# Altium PCB PCB.PcbDoc (part 2 of 2)
Units mil, origin at the board's own origin, x right, y up, seen from the top; angles counter-clockwise.
Board outline 10740 x 3770 mil, 2 copper layers (Top Layer, Bottom Layer); 124 components, 113 nets, 453 pads, 174 vias.
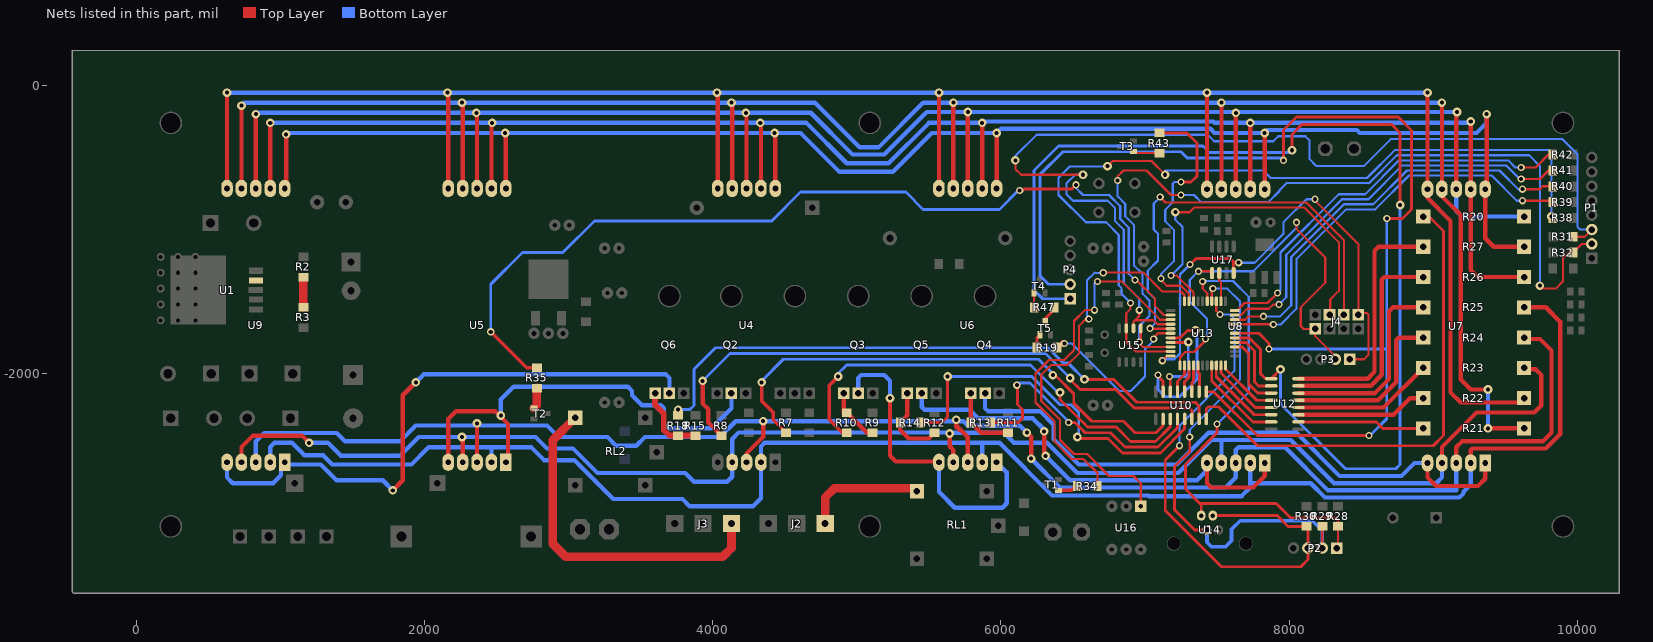
[diagram p2: the nets of this part, all layers, seen from the top]

## Via types
v1: diameter 60, hole 28, Top Layer to Bottom Layer, 82 vias
v2: diameter 50, hole 28, Top Layer to Bottom Layer, 81 vias
v3: diameter 80, hole 35, Top Layer to Bottom Layer, 7 vias
v4: diameter 60, hole 35, Top Layer to Bottom Layer, 1 vias
v5: diameter 80, hole 28, Top Layer to Bottom Layer, 1 vias
v6: diameter 100, hole 40, Top Layer to Bottom Layer, 1 vias
v7: diameter 50, hole 28, Top Layer to Bottom Layer, tented bottom, 1 vias

## Nets (pads, with @x,y where several pads share a name; then routed paths per layer and width w, separated by ;. In a path a pad name is that pad's centre, name@x,y a point inside that pad or via, vN(x,y) a via of type N, cw(c..) or ccw(c..) an arc to the next point about the centre after c; other vN are vias at no path point) (continued)
NetQ2_2: Q2.2 U5.1 U5.5 | length 3166.2
  Top Layer w30: U5.5@2165,-2615 2165,-2315 2220,-2260 2490,-2260 v1@2520,-2290 ; v1(2530,-2290) v1@2520,-2290 ; U5.1@2565,-2615 2580,-2600 2580,-2350 v1@2520,-2290
  Bottom Layer w30: v1(2530,-2290) 2530,-2180 2620,-2090 3410,-2090 3440,-2120 3440,-2150 3510,-2220 3640,-2220 3660,-2240 3660,-2350 3690,-2380 3990,-2380 4130,-2240 Q2.2@4130,-2137.5
NetQ3_1: Q3.1 R9.1 R10.2 | length 384.6
  Top Layer w30: Q3.1@4910,-2137.5 4910,-2270 R10.2@4920,-2280 ; R10.2@4930,-2270 5070,-2410 R9.1@5110,-2410
NetQ3_2: Q3.2 U6.1 U6.5 | length 2283
  Top Layer w30: v1(5230,-2170) 5230,-2570 5270,-2610 5565,-2610 U6.5@5570,-2615 ; U6.1@5970,-2615 U6.1@5975,-2615
  Bottom Layer w30: Q3.2@5010,-2137.5 5010,-2030 5030,-2010 5190,-2010 5230,-2050 v1(5230,-2170) ; U6.5@5570,-2615 5570,-2820 5680,-2930 6010,-2930 6040,-2900 6040,-2685 U6.1@5970,-2615
NetQ4_1: Q4.1 R11.1 R13.2 | length 541.5
  Top Layer w30: Q4.1@5790,-2137.5 5790,-2260 R13.2@5790,-2340 5793.64,-2340 5863.64,-2410 5940,-2410 ; 5990,-2410 5940,-2410 ; R11.1@6050,-2410 5940,-2410
NetQ4_2: Q4.2 U7.1 U7.5 | length 4336.1
  Top Layer w30: U7.5@8960,-2620 8960,-2720 9020,-2780 9310,-2780 9360,-2730 U7.1@9360,-2620
  Bottom Layer w30: Q4.2@5915,-2112.5 Q4.2@5890,-2137.5 5890,-2240 5910,-2260 6270.5,-2260 6365,-2354.5 6365,-2454.29 6540.71,-2630 7220,-2630 7440,-2410 8050,-2410 8350,-2710 8780,-2710 8870,-2620 U7.5@8960,-2620
NetQ5_1: Q5.1 R12.2 R14.1 | length 554.6
  Top Layer w30: Q5.1@5350,-2137.5 5350,-2290 R14.1@5300,-2340 5300,-2390 5360,-2450 5500,-2450 R12.2@5540,-2410
NetQ5_2: Q5.2 U8.1 U8.5 | length 3137.9
  Top Layer w30: v1(6300,-2400) 6300,-2560 v1(6310,-2570) ; U8.5@7430,-2620 7430,-2760 7460,-2790 7750,-2790 7830,-2710 U8.1@7830,-2620
  Bottom Layer w30: Q5.2@5450,-2137.5 5450,-2230 5470,-2250 5780,-2250 5840,-2310 6220,-2310 6300,-2390 v1(6300,-2400) ; v1(6310,-2570) 6480,-2740 7360,-2740 7430,-2670 U8.5@7430,-2620
NetQ6_1: Q6.1 R15.1 R18.2 | length 513.9
  Top Layer w40: Q6.1@3600,-2137.5 3600,-2215.93 3660,-2275.93 3660,-2390 3700,-2430 R18.2@3760,-2430 R15.1@3880,-2430
NetQ6_2: Q6.2 U9.1 U9.5 | length 4167.4
  Top Layer w30: v1(1780,-2810) 1850,-2740 1850,-2150 v1(1940,-2060)
  Bottom Layer w30: U9.5@630,-2615 630,-2720 670,-2760 950,-2760 1005,-2705 1005,-2640 U9.1@1030,-2615 1045,-2630 1280,-2630 1390,-2740 1710,-2740 v1(1780,-2810) ; v1(1940,-2060) 1995,-2005 3675,-2005 3700,-2030 Q6.2@3700,-2137.5
NetR2_1: R2.1 R3.2 U1.4 | length 210
  Top Layer w60: R3.2@1160,-1540 R2.1@1160,-1330
NetR19_1: R19.1 T5.1 | length 98.3
  Top Layer w20: R19.1@6250,-1820 6250,-1750 T5.1@6270,-1730
NetR20_1: R20.1 U10.16 | length 3463
  Top Layer w20: U10.16@7425,-2314.49 7425,-2245 7440,-2230 7510,-2230 7780,-2500 9000,-2500 9070,-2430 9070,-1010 8970,-910 R20.1@8930,-910
NetR21_1: R21.1 U12.10 | length 884.2
  Top Layer w20: U12.10@8064.49,-2335 8605,-2335 8650,-2380 R21.1@8930,-2380
NetR22_1: R22.1 U12.11 | length 913.1
  Top Layer w30: U12.11@8064.49,-2285 8725,-2285 8840,-2170 R22.1@8930,-2170
NetR23_1: R23.1 U12.12 | length 979.4
  Top Layer w30: U12.12@8064.49,-2235 8655,-2235 R23.1@8930,-1960
NetR24_1: R24.1 U12.13 | length 1216
  Top Layer w30: U12.13@8064.49,-2185 8615.71,-2185 8742.5,-2058.21 8742.5,-1767.5 8760,-1750 R24.1@8930,-1750
NetR25_1: R25.1 U12.14 | length 1387.3
  Top Layer w30: U12.14@8064.49,-2135 8595,-2135 8692.5,-2037.5 8692.5,-1567.5 8720,-1540 R25.1@8930,-1540
NetR26_1: R26.1 U12.15 | length 1565.3
  Top Layer w30: U12.15@8064.49,-2085 8565.71,-2085 8642.5,-2008.21 8642.5,-1347.5 8660,-1330 R26.1@8930,-1330
NetR27_1: R27.1 U12.16 | length 1736.6
  Top Layer w30: U12.16@8064.49,-2035 8545,-2035 8592.5,-1987.5 8592.5,-1147.5 8620,-1120 R27.1@8930,-1120
NetR34_2: R34.2 T1.1 | length 142.4
  Top Layer w25: T1.1@6400,-2810 6490,-2810 6520,-2780 R34.2@6530,-2780
NetR35_2: R35.2 T2.1 | length 148.3
  Top Layer w60: T2.1@2760,-2240 2780,-2220 R35.2@2780,-2100
NetR43_1: R43.1 T3.1 | length 160
  Top Layer w15: T3.1@6940,-470 R43.1@7100,-470
NetR47_1: R47.1 T4.1 | length 100
  Top Layer w15: R47.1@6230,-1540 T4.1@6230,-1440
NetR47_2: R47.2 T5.3 | length 110.9
  Top Layer w20: T5.3@6307.5,-1640 6307.5,-1617.5 R47.2@6370,-1555
NO: J3.1 RL2.2 | length 2412.4
  Top Layer w60: RL2.2@3047.5,-2305 2890,-2462.5 2890,-3180 2980,-3270 4070,-3270 4130,-3210 J3.1@4130,-3040
NO2: J2.1 RL1.2 | length 854.4
  Top Layer w60: J2.1@4780,-3040 4780,-2860 4845,-2795 RL1.2@5427.5,-2795
RA0: R39.2 U13.19 | length 2931.8
  Top Layer w15: U13.19@7622.44,-1657.01 7887.01,-1657.01 v2(7890,-1660) ; v2(9620,-800) R39.2@9850,-800
  Bottom Layer w15: v2(7890,-1660) 7940,-1660 8050,-1550 8050,-1205.5 8395.5,-860 8596.97,-860 8831.97,-625 9405,-625 9580,-800 v2(9620,-800)
RA1: R40.2 U13.20 | length 2902.5
  Top Layer w15: U13.20@7622.44,-1625.51 7694.49,-1625.51 7717.5,-1602.5 v2(7821.49,-1602.5) ; v2(9620,-720) 9740,-720 9760,-700 R40.2@9830,-700
  Bottom Layer w15: v2(7821.49,-1602.5) 7937.5,-1602.5 8015,-1525 8015,-1191.01 8381.01,-825 8582.47,-825 8817.47,-590 9460,-590 9600,-730 9610,-720 v2(9620,-720)
RA2: R41.2 U13.21 | length 2898.8
  Top Layer w15: U13.21@7622.44,-1594.02 7665.98,-1594.02 7710,-1550 7859.5,-1550 7889.5,-1520 v2(7930,-1520) ; v2(9610,-650) 9740,-650 9800,-590 R41.2@9830,-590
  Bottom Layer w15: v2@7920,-1500 7920,-1510 v2(7930,-1520) 7980,-1470 7980,-1175.5 8140.5,-1015 8141.51,-1015 8366.51,-790 8550,-790 8785,-555 9505,-555 9600,-650 v2(9610,-650)
RA3: R42.2 U13.22 | length 2849.7
  Top Layer w15: U13.22@7622.44,-1562.52 7637.48,-1562.52 7690,-1510 7850,-1510 v2(7920,-1440) ; v2(9610,-570) 9710,-570 9800,-480 R42.2@9830,-480
  Bottom Layer w15: v2(7920,-1440) 7940,-1420 7940,-1160 8345,-755 8527.03,-755 8762.03,-520 9519.5,-520 9569.5,-570 v2(9610,-570)
RA6_BUZZER: R43.2 U13.31 | length 1746.7
  Top Layer w15: v2(7110,-1340) 7110,-1350 7150,-1390 7250,-1390 7305.51,-1445.51 U13.31@7305.51,-1497.56
  Top Layer w20: R43.2@7100,-330 7290,-330 7360,-400 7360,-630 7320,-670 v2(7250,-670)
  Bottom Layer w15: v2(7110,-1340) 7110,-1310 7200,-1220 7200,-1002.63 7140,-942.63 7140,-863.74 7192.5,-811.24 7192.5,-682.5 7205,-670 v2(7250,-670)
RA7: J4.5 U13.30 | length 2536.4
  Top Layer w15: v2(7180,-1320) 7220,-1320 7337.01,-1437.01 U13.30@7337.01,-1497.56 ; v1(7210,-880) 7308.68,-880 7341.18,-847.5 8103.76,-847.5 8345,-1088.74 8345,-1425 8285,-1485 8285,-1585 J4.5@8280,-1590
  Bottom Layer w15: v2(7180,-1320) 7260,-1240 7260,-981.32 7210,-931.32 v1(7210,-880)
RB0_A: U12.7 U13.8 | length 638.1
  Top Layer w20: U13.8@7462.99,-1942.44 7462.99,-2050 7463.43,-2050 7748.43,-2335 U12.7@7875.51,-2335
RB1_B: U12.6 U13.9 | length 590
  Top Layer w20: 7494.49,-2000 7494.49,-2021.06 ; U13.9@7494.49,-1942.44 7494.49,-2021.06 ; U12.6@7875.51,-2285 7758.43,-2285 7494.49,-2021.06
RB2_C: U12.5 U13.10 | length 502.1
  Top Layer w20: U13.10@7525.98,-1942.44 7525.98,-1995.98 7765,-2235 U12.5@7875.51,-2235
RB3_D: U12.4 U13.11 | length 433.2
  Top Layer w20: U13.11@7557.48,-1942.44 7557.48,-1967.48 7775,-2185 U12.4@7875.51,-2185
RB4_E: U12.3 U13.14 | length 510.9
  Top Layer w20: U13.14@7622.44,-1814.49 7674.49,-1814.49 7720,-1860 7720,-2073.43 7781.57,-2135 U12.3@7875.51,-2135
RB5_F: U12.2 U13.15 | length 503.2
  Top Layer w20: U13.15@7622.44,-1782.99 7699.56,-1782.99 7760,-1843.43 7760,-2056.86 7788.14,-2085 U12.2@7875.51,-2085
RB6_G: P4.1 U12.1 U13.16 | length 8033.6
  Top Layer w20: U13.16@7622.44,-1751.5 7721.5,-1751.5 7800,-1830 7800,-2000 7835,-2035 U12.1@7875.51,-2035 v1(7940,-1970.51) ; v1(8020,-450) 8020,-340 8090,-270 8710,-270 8770,-330 v1(8770,-830)
  Bottom Layer w20: P4.1@6480,-1480 6290,-1480 6230,-1420 6230,-590 6400,-420 7402.1,-420 7447.1,-465 8005,-465 v1(8020,-450) ; v1(7940,-1970.51) 7940,-2210 8390,-2660 8740,-2660 8770,-2630 v1(8770,-830)
RB7_H: P4.2 U10.1 U13.17 | length 8581.4
  Top Layer w20: U10.1@7425,-2125.51 7475.51,-2125.51 7780,-2430 v2(8555,-2430) ; U13.17@7622.44,-1720 7790,-1720 7860,-1790 v2(7860,-1830) ; v2(7960,-520) 7960,-310 8050,-220 8756.57,-220 8850,-313.43 8850,-860 8787.5,-922.5 v2(8677.5,-922.5)
  Bottom Layer w20: P4.2@6480,-1380 6330,-1380 6270,-1320 6270,-620 6430,-460 7250,-460 7295,-505 7945,-505 v2(7960,-520) ; v2(7860,-1830) 8670,-1830 8677.5,-1822.5 ; v2(8555,-2430) 8560,-2430 8677.5,-2312.5 8677.5,-1822.5 ; v2(8677.5,-922.5) 8677.5,-1822.5
RC0: U13.32 U16.1 | length 3033.2
  Top Layer w15: v2(6610,-1620) 6590,-1620 6542.5,-1667.5 6542.5,-1857.5 6460,-1940 6348.68,-1940 6280,-2008.68 6280,-2190 6410,-2320 6410,-2460.5 6507.53,-2558.03 6598.03,-2558.03 6750,-2710 6920,-2710 6970,-2760 U16.1@6970,-2920 ; v2(6710,-1300) 6712.5,-1297.5 6987.5,-1297.5 7120,-1430 7250,-1430 7274.02,-1454.02 U13.32@7274.02,-1497.56
  Bottom Layer w15: v2(6610,-1620) 6610,-1606.75 6597.5,-1594.25 6597.5,-1352.5 6650,-1300 6651.01,-1301.01 6708.99,-1301.01 v2(6710,-1300)
RC1_RELAY2: R35.1 U13.35 | length 6512.8
  Top Layer w15: v2(6930,-1350) 6940,-1350 7070,-1480 7070,-1532.51 7131.51,-1594.02 U13.35@7177.56,-1594.02
  Top Layer w20: v2(6130,-730) 6151.21,-730 6163.71,-717.5 6492.5,-717.5 v2(6520,-690)
  Top Layer w25: v2(2460,-1710) 2710,-1960 R35.1@2780,-1960
  Bottom Layer w15: v2(6520,-690) 6520,-710 6570,-760 6750,-760 6827.5,-837.5 6827.5,-927.5 6887.5,-987.5 6887.5,-1307.5 v2(6930,-1350)
  Bottom Layer w20: v2(2460,-1710) 2460,-1380 2680,-1160 2960,-1160 3180,-940 4410,-940 4609.29,-740.71 5340.71,-740.71 5460,-860 5990,-860 6120,-730 v2(6130,-730)
RC2_RELAY1: R34.1 U13.36 | length 2552.3
  Top Layer w15: v2@6652.5,-1557.5 6585.32,-1557.5 6507.5,-1635.32 6507.5,-1837.5 6440,-1905 6334.19,-1905 6329.19,-1910 6327.57,-1910 6326.99,-1910.59 6326.99,-1912.2 6240,-1999.19 6240,-2200 6372.5,-2332.5 6372.5,-2472.5 6493.03,-2593.03 6573.03,-2593.03 6670,-2690 R34.1@6670,-2780 ; v2(6670,-1360) 6839.5,-1360 7105.01,-1625.51 U13.36@7177.56,-1625.51
  Bottom Layer w15: v2(6650,-1560) 6650,-1370 6660,-1360 v2(6670,-1360)
RC5_SQW: R38.1 U13.43 U15.7 | length 5879.4
  Top Layer w15: v1(6740,-560) 6775,-525 7045,-525 v1(7140,-620) ; v2(6900,-1510) 6900,-1550 6870,-1580 U15.7@6870,-1685.75 6870,-1780 6935.98,-1845.98 U13.43@7177.56,-1845.98 ; v1(9820,-910) R38.1@9830,-920
  Bottom Layer w15: v1(6740,-560) 6737.5,-562.5 6477.5,-562.5 6400,-640 6400,-760 6590,-950 6730,-950 6817.5,-1037.5 6817.5,-1387.5 6837.5,-1407.5 6837.5,-1447.5 v2(6900,-1510) ; v1(7140,-620) 7140,-590 7820,-590 7872.5,-642.5 8540.53,-642.5 8735.53,-447.5 9797.5,-447.5 9820,-470 v1(9820,-910)
RC6-TX: J4.1 P3.1 U13.44 U17.4 | length 3490.2
  Top Layer w15: v2(7120,-1910) 7152.52,-1877.48 U13.44@7177.56,-1877.48 ; v2(8180,-790) 8180,-800 8480,-1100 J4.1@8480,-1590 8490,-1580 8540,-1580 8550,-1590 8550,-1870 8520,-1900 P3.1@8420,-1900
  Top Layer w20: v2(7312.5,-1242.5) 7355,-1200 7590,-1200 7615,-1225 ; U17.4@7615,-1302.52 7615,-1225 ; v2(7650,-1230) 7620,-1230 7615,-1225
  Bottom Layer w15: v2(7120,-1910) 7130,-1900 7202.5,-1900 7242.5,-1860 7242.5,-1312.5 v2(7312.5,-1242.5) ; v2(7650,-1230) 7760.5,-1230 7960,-1030.5 7960,-950 8120,-790 v2(8180,-790)
RC7-RX: J4.8 P3.2 U13.1 U17.1 | length 3042.1
  Top Layer w15: U13.1@7242.52,-1942.44 7242.52,-1887.48 7280,-1850 7340,-1850 7420,-1770 v2(7420,-1760) ; v2(7370,-1290) 7452.48,-1290 U17.1@7465,-1302.52 ; v2(8050,-950) 8050,-994.25 8250,-1194.25 8250,-1370 8080,-1540 8080,-1670 8100,-1690 J4.8@8180,-1690 8180,-1740 8320,-1880 P3.2@8320,-1900
  Bottom Layer w15: v2(7420,-1760) 7410,-1750 7430,-1730 7430,-1620 7310,-1500 7310,-1350 v2(7370,-1290) 7750,-1290 8050,-990 v2(8050,-950)
RD0: J4.3 U13.38 | length 3082.5
  Top Layer w15: v7(7034.34,-1685.66) 7034.34,-1674.34 7048.5,-1688.5 U13.38@7177.56,-1688.5 ; v2(7105,-775) 7142.5,-812.5 8118.25,-812.5 8380,-1074.25 J4.3@8380,-1590
  Bottom Layer w15: v7(7034.34,-1685.66) 7070,-1650 7070,-1482.74 7018.51,-1431.24 7018.51,-1286.95 7090,-1215.46 7090,-1030 7060,-1000 7060,-820 v2(7105,-775)
RD1_LED_7_CONTROL: R19.2 U13.39 | length 1299.1
  Top Layer w15: v2@6424.88,-1774.88 6390,-1809.76 R19.2@6390,-1820 6410,-1820 v2(6440,-1790) ; v2(7060,-1760) 7050,-1760 7090,-1720 U13.39@7177.56,-1720
  Bottom Layer w15: v2(6440,-1790) 6490,-1790 6820,-2120 6900,-2120 7000,-2020 7000,-1830 7060,-1770 v2(7060,-1760)
RD2_SEGMENT_4_CONTROL: U10.7 U13.40 | length 1108.3
  Top Layer w20: v2(7090,-2010) 7090,-2017.78 7125,-2052.78 U10.7@7125,-2125.51 ; U13.40@7177.56,-1751.5 7243.65,-1751.5 7295.15,-1700 v1(7350,-1700)
  Bottom Layer w20: v2(7090,-2010) 7090,-2110 7140,-2160 7240,-2160 7360,-2040 7360,-1720 7350,-1710 v1(7350,-1700)
RD3_SEGMENT_5_CONTROL: U10.6 U13.41 | length 589.5
  Top Layer w20: v2(7170,-2020) 7175,-2025 U10.6@7175,-2125.51 ; U13.41@7177.56,-1782.99 7297.01,-1782.99 v1(7300,-1780)
  Bottom Layer w20: v2(7170,-2020) 7280,-2020 7300,-2000 v1(7300,-1780)
RD4_SEGMENT_3_CONTROL: U10.5 U13.2 | length 203.4
  Top Layer w20: U10.5@7225,-2125.51 7225,-2055 7274.02,-2005.98 U13.2@7274.02,-1942.44
RD5_SEGMENT_1_CONTROL: U10.4 U13.3 | length 195.7
  Top Layer w20: U10.4@7275,-2125.51 7275,-2055 7305.51,-2024.49 U13.3@7305.51,-1942.44
RD6_SEGMENT_2_CONTROL: U10.3 U13.4 | length 188
  Top Layer w20: U10.3@7325,-2125.51 7325,-2061.57 7337.01,-2049.56 U13.4@7337.01,-1942.44
RD7_SEGMENT_6_CONTROL: U10.2 U13.5 | length 187.4
  Top Layer w20: U13.5@7368.5,-1942.44 7368.5,-1992.3 7377.01,-2000.81 7377.01,-2123.5 U10.2@7375,-2125.51
RE: U13.24 U17.2 | length 199.6
  Top Layer w15: U17.2@7515,-1302.52 7515,-1354.5 7525.98,-1365.48 U13.24@7525.98,-1497.56
RE0: P2.3 R30.1 U13.25 U14.2 | length 3840
  Top Layer w15: U13.25@7494.49,-1497.56 7494.49,-1564.49 v2(7520,-1590) ; R30.1@8120,-3080 R30.1@8120,-3060
  Top Layer w20: v2(7240,-2500) 7140,-2600 7140,-2950 7530,-3340 8080,-3340 8130,-3290 P2.3@8130,-3210 8130,-3090 8120,-3080 8100,-3060 7993.03,-3060 7917.76,-2984.72 U14.2@7470.08,-2984.72
  Bottom Layer w15: v2(7240,-2500) 7240,-2360 7620,-1980 7620,-1620 7590,-1590 v2(7520,-1590)
RE1: P2.2 R29.1 U13.26 U14.3 | length 3552.2
  Top Layer w15: U13.26@7462.99,-1497.56 7462.99,-1417.01 v2(7470,-1410) ; P2.2@8230,-3210 R29.1@8230,-3060
  Top Layer w20: v2(7310,-2440) 7310,-2540 7205,-2645 7205,-2945 7344.72,-3084.72 U14.3@7429.92,-3084.72
  Bottom Layer w15: v2(7310,-2440) 7310,-2390 7660,-2040 7660,-1500 7570,-1410 v2(7470,-1410)
  Bottom Layer w25: U14.3@7429.92,-3084.72 7429.92,-3169.92 7460,-3200 7560,-3200 7600,-3160 7600,-3080 7660,-3020 8160,-3020 8230,-3090 P2.2@8230,-3210
RE2: P2.1 R28.1 U13.27 U14.4 | length 3467.9
  Top Layer w15: v2(7400,-1360) 7400,-1410 7431.5,-1441.5 U13.27@7431.5,-1497.56 ; P2.1@8330,-3210 8340,-3200 R28.1@8340,-3060
  Top Layer w20: U14.4@7389.76,-2984.72 7390,-2984.49 7390,-2900 ; v2(7500,-2350) 7500,-2410 7280,-2630 7280,-2800 7380,-2900 7390,-2900 ; R28.1@8340,-3060 8340,-3010 8330,-3000 8010,-3000 7910,-2900 7390,-2900
  Bottom Layer w15: v2(7400,-1360) 7402.5,-1357.5 7610,-1357.5 7720,-1467.5 7720,-2130 v2(7500,-2350)
SCL: P1.3 R31.1 U13.37 U15.6 | length 7387.3
  Top Layer w15: v1(6100,-520) 6100,-580 6140,-620 v1(6570,-620) ; U15.6@6920,-1685.75 6920,-1640 6930,-1630 ; v2(6960,-1560) 6960,-1600 6930,-1630 ; U13.37@7177.56,-1657.01 7087.01,-1657.01 7060,-1630 6930,-1630 ; R31.1@9970,-1050 10050,-1050 P1.3@10100,-1000
  Bottom Layer w15: v1(6100,-520) 6100,-490 6247.5,-342.5 7434.2,-342.5 7479.2,-387.5 7889.47,-387.5 7924.47,-352.5 8112.5,-352.5 8140,-380 8140,-510 8190,-560 8516.97,-560 8704.47,-372.5 9896.26,-372.5 10000,-476.24 10000,-980 10020,-1000 P1.3@10100,-1000 ; v1(6570,-620) 6515,-620 6455,-680 6455,-755 6500,-800 6740.5,-800 6792.5,-852 6792.5,-942 6852.5,-1002 6852.5,-1372.5 6960,-1480 v2(6960,-1560)
SDL: P1.2 R32.1 U13.42 U15.5 | length 6209.1
  Top Layer w15: v2(6810,-660) 6810,-630 6850,-590 7010,-590 7180,-760 v2(7250,-760) ; v2(6960,-1780) 6970,-1770 U15.5@6970,-1685.75 ; v2@6970,-1800 6984.49,-1814.49 U13.42@7177.56,-1814.49 ; v1(9740,-1390) 9760,-1410 9850,-1410 9900,-1360 9900,-1200 9940,-1160 R32.1@9970,-1160 10030,-1100 P1.2@10100,-1100
  Bottom Layer w15: v2(6810,-660) 6810,-770 6862.5,-822.5 6862.5,-907.96 6922.5,-967.96 6922.5,-1247.96 6983.51,-1308.96 6983.51,-1445.74 7030,-1492.24 7030,-1600 6960,-1670 v2(6960,-1780) ; v2(7250,-760) 7340,-760 7390,-810 7855.46,-810 7933.16,-732.3 7933.16,-726.84 7982.5,-677.5 8555.03,-677.5 8747.53,-485 9665,-485 9740,-560 v1(9740,-1390)
SEGMENT_1_CONTROL: R7.2 U10.10 | length 3600.1
  Top Layer w20: v1(6360,-2010) 6375.15,-2010 6505.15,-2140 6505.15,-2205.15 6630,-2330 6850,-2330 6930,-2410 7076.86,-2410 7125,-2361.86 U10.10@7125,-2314.49
  Top Layer w25: v1(4340,-2060) 4340,-2190 4420,-2270 4420,-2320 R7.2@4510,-2410
  Bottom Layer w20: v1(4340,-2060) 4340,-2050 4490,-1900 6260,-1900 6360,-2000 v1(6360,-2010)
SEGMENT_2_CONTROL: R8.1 U10.14 | length 4136.7
  Top Layer w20: v1(6480,-2030) 6480,-2040 6550,-2110 6796.57,-2110 6925.39,-2238.82 7308.82,-2238.82 7325,-2255 U10.14@7325,-2314.49
  Top Layer w30: v1(3930,-2050) 3930,-2207 3970,-2247 3970,-2340 R8.1@4060,-2430
  Bottom Layer w20: v1(3930,-2050) 4120,-1860 6310.4,-1860 6480,-2029.6 v1(6480,-2030)
SEGMENT_3_CONTROL: R10.1 U10.11 | length 3176.8
  Top Layer w20: v1(6410,-2130) 6410,-2180 6570,-2340 6571.42,-2340 6601.42,-2370 6800,-2370 6900,-2470 7073.43,-2470 7175,-2368.43 U10.11@7175,-2314.49
  Top Layer w25: v1(4870,-2020) 4810,-2080 4810,-2320 4900,-2410 R10.1@4930,-2410
  Bottom Layer w20: v1(4870,-2020) 4870,-2000 4930,-1940 6205.15,-1940 6395.15,-2130 v1(6410,-2130)
SEGMENT_4_CONTROL: R13.1 U10.12 | length 1914.4
  Top Layer w20: R13.1@5930,-2340 6120,-2340 6150,-2310 6150,-2250 6114.45,-2214.45 6114.45,-2084.45 v2(6110,-2080) ; v2(6470,-2340) 6513.43,-2340 6553.43,-2380 6554.85,-2380 6584.85,-2410 6760,-2410 6860,-2510 7090,-2510 7225,-2375 U10.12@7225,-2314.49
  Bottom Layer w20: v2(6110,-2080) 6110,-2070 6115,-2065 6202.78,-2065 6455,-2317.22 6455,-2321.57 6458.43,-2325 6463.58,-2325 6470,-2331.42 v2(6470,-2340)
SEGMENT_5_CONTROL: R14.2 U10.13 | length 2601.7
  Top Layer w20: R14.2@5440,-2340 5590,-2340 5630,-2300 v1(5630,-2020) ; v1(6530,-2440) 6540,-2450 6743.43,-2450 6843.43,-2550 7106.57,-2550 7275,-2381.57 U10.13@7275,-2314.49
  Bottom Layer w20: v1(5630,-2020) 6214.35,-2020 6410,-2215.65 6485.65,-2215.65 6540,-2270 6540,-2430 v1(6530,-2440)
SEGMENT_6_CONTROL: R18.1 U10.15 | length 4236.8
  Top Layer w20: R18.1@3760,-2290 v1(3760,-2250) ; v1(6580,-2040) 6783.14,-2040 6941.96,-2198.82 7348.82,-2198.82 7375,-2225 U10.15@7375,-2314.49
  Bottom Layer w20: v1(3760,-2250) 3840,-2250 3870,-2220 3870,-1970 4020,-1820 6326.97,-1820 6434.47,-1927.5 6467.5,-1927.5 v1(6580,-2040)
SEGMENT_A: R21.2 U4.7 U5.7 U6.7 U7.7 U8.7 U9.7 | length 14222.1
  Top Layer w30: U9.7@730,-715 v1(730,-140) ; v1(2260,-120) 2265,-125 U5.7@2265,-715 ; v1(4130,-120) 4135,-125 U4.7@4135,-715 ; U6.7@5670,-715 v1(5670,-120) ; U8.7@7530,-720 v1(7530,-120) ; v1(9060,-120) U7.7@9060,-720 9060,-770 9190,-900 9190,-2040 9260,-2110 v1(9380,-2110) ; v1(9380,-2380) 9580,-2380
  Bottom Layer w30: v1(730,-140) 750,-120 v1(2260,-120) v1(4130,-120) 4710,-120 5020,-430 5150,-430 5460,-120 v1(5670,-120) v1(7530,-120) v1(9060,-120) ; v1(9380,-2380) v1(9380,-2110)
SEGMENT_B: R22.2 U4.6 U5.6 U6.6 U7.6 U8.6 U9.6 | length 14349.4
  Top Layer w30: U9.6@630,-715 v1(630,-50) ; v1(2160,-50) 2165,-55 U5.6@2165,-715 ; v1(4030,-50) 4035,-55 U4.6@4035,-715 ; U6.6@5570,-715 v1(5570,-50) ; U8.6@7430,-720 v1(7430,-50) ; v1(8960,-50) U7.6@8960,-720 8960,-780 9120,-940 9120,-2130 9190,-2200 R22.2@9630,-2200
  Bottom Layer w30: v1(630,-50) v1(2160,-50) v1(4030,-50) v1(5570,-50) v1(7430,-50) v1(8960,-50)
SEGMENT_C: R23.2 U4.4 U5.4 U6.4 U7.4 U8.4 U9.4 | length 11327.1
  Top Layer w30: U9.4@730,-2615 730,-2510 810,-2430 1150,-2430 v1(1200,-2480) ; v1(2260,-2440) 2265,-2445 U5.4@2265,-2615 ; v1(5644.45,-2415) 5644.45,-2504.45 5670,-2530 U6.4@5670,-2615 ; U7.4@9060,-2620 9060,-2510 9300,-2270 9700,-2270 9750,-2220 ; R23.2@9620,-1970 9710,-1970 9750,-2010 9750,-2220 ; 9750,-2180 9750,-2220
  Bottom Layer w30: v1(1200,-2480) 1330,-2480 1420,-2570 1830,-2570 1960,-2440 v1(2260,-2440) 2770,-2440 2850,-2520 3030.71,-2520 3200.71,-2690 3810,-2690 3870,-2750 4100,-2750 4135,-2715 U4.4@4135,-2615 4135,-2452.99 4180,-2407.99 5637.44,-2407.99 v1@5640,-2410.55 ; v1(5644.45,-2415) v1@5640,-2410.55 ; U8.4@7530,-2620 7530,-2460 ; U7.4@9060,-2620 9060,-2720 9020,-2760 8310.71,-2760 8010.71,-2460 7530,-2460 ; v1@5640,-2410.55 6020.55,-2410.55 6090,-2480 6320,-2480 6530,-2690 7230.71,-2690 7460.71,-2460 7530,-2460
SEGMENT_D: R24.2 U4.3 U5.3 U6.3 U7.3 U8.3 U9.3 | length 12099.4
  Top Layer w30: U5.3@2365,-2615 v1(2365,-2345) ; U4.3@4235,-2615 4235,-2555 4350,-2440 v1(4350,-2330) ; v1(5690,-2320) 5690,-2360 ; 5710,-2388.63 5690,-2368.63 5690,-2360 ; U6.3@5770,-2615 5770,-2440 5690,-2360 ; v1(6180,-2410) 6210,-2440 v1(6210,-2590) ; U7.3@9160,-2620 9160,-2510 9200,-2470 9760,-2470 9820,-2410 9820,-1840 9740,-1760 R24.2@9620,-1760
  Bottom Layer w30: U9.3@830,-2615 830,-2470 888.21,-2411.79 1391.79,-2411.79 1450,-2470 1830,-2470 1940,-2360 2850,-2360 2930,-2440 3270,-2440 3330,-2500 3470,-2500 3530,-2440 4050,-2440 4160,-2330 4340,-2330 v1@4340,-2340 ; v1(4350,-2330) 5739.45,-2330 5770,-2360.55 6130.55,-2360.55 v1(6180,-2410) ; v1(6210,-2590) 6410,-2790 7560,-2790 7630,-2720 U8.3@7630,-2620 7630,-2530 7650,-2510 7970,-2510 8270,-2810 9160,-2810 U7.3@9160,-2620
SEGMENT_E: R25.2 U4.2 U5.2 U6.2 U7.2 U8.2 U9.2 | length 11774.8
  Top Layer w30: U7.2@9260,-2620 9260,-2530 9270,-2520 9780.71,-2520 9880,-2420.71 9880,-1640 9780,-1540 R25.2@9630,-1540
  Bottom Layer w30: U9.2@930,-2615 930,-2510 960,-2480 1080,-2480 1166.79,-2566.79 1296.79,-2566.79 1360,-2630 1910,-2630 2030,-2510 2460,-2510 ; U5.2@2465,-2615 2465,-2515 2460,-2510 ; U6.2@5870,-2615 5870,-2480 ; U8.2@7730,-2620 7730,-2760 ; U7.2@9260,-2620 9260,-2770 9210,-2820 9210,-2830.71 9180.71,-2860 8249.29,-2860 8149.29,-2760 7730,-2760 ; 2460,-2510 2740,-2510 2830,-2600 3040,-2600 3310,-2870 3790,-2870 3840,-2920 4280,-2920 4335,-2865 U4.2@4335,-2615 4335,-2505 4360,-2480 5870,-2480 ; 5870,-2480 5990,-2480 6355,-2845 7024.5,-2845 7029.5,-2850 7670,-2850 7730,-2790 7730,-2760
SEGMENT_F: R26.2 U4.9 U5.9 U6.9 U7.9 U8.9 U9.9 | length 12324.6
  Top Layer w30: U9.9@930,-715 v1(930,-260) ; U5.9@2465,-715 2465,-265 v1(2470,-260) ; U4.9@4310,-690 U4.9@4335,-715 4335,-265 v1(4330,-260) ; U6.9@5870,-715 v1(5870,-260) ; U8.9@7730,-720 v1(7730,-260) ; v1(9260,-250) U7.9@9260,-720 9260,-1280 9310,-1330 R26.2@9630,-1330
  Bottom Layer w30: v1(930,-260) v1(2470,-260) v1(4330,-260) 4650,-260 4930,-540 5220,-540 5500,-260 v1(5870,-260) 5880,-250 7472.52,-250 7482.52,-260 v1(7730,-260) 9250,-260 v1(9260,-250) v1@9270,-250
SEGMENT_G: R27.2 U4.10 U5.10 U6.10 U7.10 U8.10 U9.10 | length 11775.5
  Top Layer w30: U9.10@1030,-715 1040,-705 v1(1040,-340) ; v1(2560,-330) 2565,-335 U5.10@2565,-715 ; v1(4430,-330) 4435,-335 U4.10@4435,-715 ; U6.10@5970,-715 v1(5970,-330) ; U8.10@7830,-720 v1(7830,-330) ; v1(9370,-200) 9370,-710 U7.10@9360,-720 9360,-1060 9420,-1120 R27.2@9630,-1120
  Bottom Layer w30: v1(1040,-340) 1050,-340 1060,-330 v1(2560,-330) v1(4430,-330) 4610,-330 4880,-600 5250,-600 5520,-330 v1(5970,-330) 6000,-300 7451.81,-300 7481.81,-330 v1(7830,-330) 7850,-310 8470,-310 8490,-330 9300,-330 9370,-260 v1(9370,-200)
SEGMENT_H: R20.2 U4.8 U5.8 U6.8 U7.8 U8.8 U9.8 | length 12391.3
  Top Layer w30: U9.8@830,-715 v1(830,-200) ; v1(2360,-190) 2365,-195 U5.8@2365,-715 ; v1(4230,-190) 4235,-195 U4.8@4235,-715 ; U6.8@5770,-715 v1(5770,-185) ; U8.8@7630,-720 v1(7630,-190) ; U7.8@9160,-720 9160,-190 v1(9165,-185)
  Bottom Layer w30: v1(830,-200) 840,-200 850,-190 v1(2360,-190) v1(4230,-190) 4680,-190 4970,-480 5190,-480 5485,-185 v1(5770,-185) v1@7625,-185 ; v1(7630,-190) v1@7625,-185 ; U7.8@9160,-720 9160,-870 9200,-910 R20.2@9630,-910 ; v1(9165,-185) v1@7625,-185
pads on no net: M1. M2. M3. M4. M5. M6. Q1.0 Q2.0 Q3.0 Q4.0 Q5.0 Q6.0 SW1.1 SW1.3 U10.9 U11.4 U12.9 U13.12 U13.13 U13.33 U13.34 U14. U16.3 U16.6

## Other copper
Top Layer:
  rectangle net 12V: 2620,-1610 2800,-1560
  rectangle net NetR43_1: 6920,-470 7110,-450
  rectangle net NetR47_1: 6220,-1530 6240,-1450
  rectangle net 12V: 4190,-2010 4270,-1910
  rectangle net 12V: 3780,-2160 3830,-1900
  rectangle net 12V: 4220,-2280 4270,-2100
  rectangle net 12V: 5090,-2250 5140,-1930
  rectangle net 12V: 5530,-2270 5580,-1950
  rectangle net NetD3_2: 1080,-3250 1160,-3070
  rectangle net Net1_1: 780,-1710 880,-1540
  rectangle net NetR2_1: 850,-1370 1170,-1330
  rectangle net NetD5_2: 760,-1000 950,-910
  rectangle net 12V: 1410,-1230 1500,-770
  region net GND: 570,-900 470,-900 470,-1250 570,-1250
  region net Net1_1: 1570,-1950 1290,-1950 1290,-2050 1570,-2050
  rectangle net GND: 2710,-1510 3000,-1200
  rectangle net 12V: 2670,-1660 2780,-1590
  rectangle net +5: 2920,-1670 3140,-1610
  rectangle net GND: 110,-1700 630,-1140
  rectangle net 12V: 4650,-2150 4700,-2050
  rectangle net GND: 2840,-1720 2880,-1490
  region net NetD3_2: 265,-1940 265,-2510 435,-2680 435,-3160 435,-3140 525,-3230 1015,-3230 1065,-3180 1065,-3120 1115,-3070 1125,-3080 1155,-3080 1155,-3250 1085,-3320 475,-3320 365,-3210 365,-2720 185,-2540 185,-1940
  region: 3560,-1360 3520,-1400 3520,-1770 3530,-1780 3880,-1780 3880,-1400 3840,-1360
  region: 3990,-1360 3950,-1400 3950,-1770 3960,-1780 4310,-1780 4310,-1400 4270,-1360
  region: 4430,-1350 4390,-1390 4390,-1760 4400,-1770 4750,-1770 4750,-1390 4710,-1350
  region: 4870,-1360 4830,-1400 4830,-1770 4840,-1780 5190,-1780 5190,-1400 5150,-1360
  region: 5310,-1350 5270,-1390 5270,-1760 5280,-1770 5630,-1770 5630,-1390 5590,-1350
  region: 5750,-1360 5710,-1400 5710,-1770 5720,-1780 6070,-1780 6070,-1400 6030,-1360
  region net 12V: 4700,-2110 4700,-2050 4560,-1910 4550,-1920 4500,-1920 4490,-1930 4660,-2100 4660,-2140
  text "RLF_1.1.3" at 9580,-3320 h40
Bottom Layer:
  rectangle net GND: 520,-2040 830,-1950
  rectangle net NetD3_2: 210,-2320 280,-1990
  rectangle net NetD1_2: 930,-3250 960,-3165
  rectangle net NetD1_2: 980,-3290 1050,-3260
  rectangle net NetD5_2: 780,-1000 1110,-930
  rectangle net GND: 110,-1700 630,-1150
  rectangle net GND: 2710,-1510 3000,-1200
  region net NetF1_1: 3130,-3090 3130,-3110 3090,-3150 2880,-3150 2810,-3220 2800,-3210 2700,-3210 2700,-3080 2770,-3010 3110,-3010
  region net 24V: 2140,-2750 2140,-2920 2100,-2960 810,-2960 760,-3010 760,-3150 680,-3150 670,-3140 670,-2950 730,-2890 2000,-2890 2050,-2840 2050,-2740
  region net NetD3_2: 1160,-3170 1160,-3060 1170,-3050 1710,-3050 1860,-3200 1910,-3200 1910,-3060 1830,-2980 1120,-2980 1070,-3030 1070,-3170
  region net NetD1_2: 1020,-3260 970,-3260 970,-3240 950,-3220 950,-3160 920,-3160 920,-3270 1010,-3270 1040,-3300 1050,-3290 1050,-3280
  region net NetD1_2: 960,-3100 960,-3250 980,-3270 990,-3260 3210,-3260 3240,-3230 3240,-3070 3260,-3050 3330,-3050 3330,-3300 3310,-3320 900,-3320 870,-3290 870,-3110 880,-3100 960,-3100 960,-3230 990,-3260 1020,-3260 1020,-3290 1010,-3300 970,-3260 910,-3260
  text "RLF_1.1.3" at 8810,-3190 h40

## Silkscreen, mask and mechanical layers (free items; w line width, h text height)
Top Overlay:
  lines w10: 3380,-3170 3460,-3170 3490,-3200 3490,-3280 ; 7370,-1050 7475,-1050 7480,-1045
  text "B" at 8220,-190 h65
  text "A" at 8430,-190 h65
  text "RES" at 6310,-1100 h40
  text "+5V" at 6300,-1210 h40
  text "GND" at 6300,-1310 h40
  text "RB7" at 6550,-1430 h40
  text "RB6" at 6550,-1500 h40
  text "G" at 8160,-1520 h40
  text "TX" at 8440,-1520 h40
  text "RA7" at 8300,-1530 h40 r90
  text "RD0" at 8400,-1530 h40 r90
  text "RX" at 8050,-1680 h40
  text "3.3V" at 8350,-1800 h40
  text "+5V" at 8040,-2010 h40
  text "G" at 8200,-2010 h40
  text "RX" at 8280,-2010 h40
  text "TX" at 8390,-2010 h40
  text "ALTOS ENGINEERS PVT.LTD." at 10200,-2940 h65 r90
  text "24V" at 3410,-3130 h60
  text "DC/AC" at 3390,-3340 h60
  text "NC" at 3690,-3340 h60
  text "C0MM" at 3830,-3340 h60
  text "NO" at 4110,-3340 h60
  text "NC" at 4340,-3340 h60
  text "C0MM" at 4480,-3340 h60
  text "NO" at 4760,-3340 h60
  text "GND" at 8050,-3380 h40 r90
  text "RE0" at 8150,-3380 h40 r90
  text "RE1" at 8240,-3380 h40 r90
  text "RE2" at 8350,-3380 h40 r90
Bottom Overlay:
  text "ALTOS ENGINEERS PVT.LTD." at 10200,-1500 h65 r90
Top Paste:
  rectangle: 5710,-1780 6070,-1390
  rectangle: 5270,-1780 5630,-1390
  rectangle: 4830,-1770 5190,-1400
  rectangle: 3520,-1780 3880,-1400
  rectangle: 2710,-1510 3000,-1200
  rectangle: 110,-1700 630,-1140
  region: 3520,-1400 3560,-1360 3840,-1360 3880,-1400 3870,-1410 3870,-1770 3530,-1770 3520,-1780
  region: 3950,-1400 3990,-1360 4270,-1360 4310,-1400 4300,-1410 4300,-1770 3960,-1770 3950,-1780
  region: 4390,-1400 4430,-1360 4710,-1360 4750,-1400 4740,-1410 4740,-1770 4400,-1770 4390,-1780
  region: 4830,-1400 4870,-1360 5150,-1360 5190,-1400 5180,-1410 5180,-1770 4840,-1770 4830,-1780
  region: 5270,-1390 5310,-1350 5590,-1350 5630,-1390 5620,-1400 5620,-1760 5280,-1760 5270,-1770
  region: 5710,-1400 5750,-1360 6030,-1360 6070,-1400 6060,-1410 6060,-1770 5720,-1770 5710,-1780
Bottom Paste:
  rectangle: 2710,-1510 3000,-1200
  rectangle: 110,-1700 630,-1140
Top Solder:
  rectangle: 2710,-1510 3000,-1200
  rectangle: 110,-1700 630,-1140
Bottom Solder:
  rectangle: 2710,-1510 3000,-1200
  rectangle: 110,-1700 630,-1140
Mechanical 1:
  lines w7: 0,10 10250,10 10250,-3390
  lines w10: 0,10 0,-3390 10250,-3390